# EAGLE board ATtiny85 (EAGLE 8.6.1)
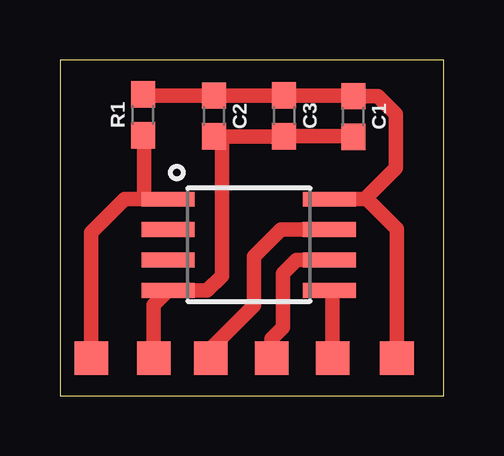
[diagram p0: board, top side]

Size 16 x 14 mm. Coordinates in mm from the lower left corner, seen from the top.
Outline: 0,0 16,0 16,14 0,14 0,0
Copper layers (1*16): Top 0.035mm / dielectric 1.5mm / Bottom 0.035mm
Design rules "OthermillDRC_1_64_v2": minimum track width 16mil, minimum drill 31mil, track to track 0.39878125mm, track to pad 0.39878125mm, pad to pad 0.39878125mm, via to via 0.39878125mm, smd to smd 0mil, copper to edge 0mil, drill to drill 1mil, minimum pad ring 0mil, minimum via ring 15mil, stop-mask expansion 1mil, vias tented up to drill 30mil, thermal gap 10mil

## Footprints (pad centres in the part's own frame; a part is rotated, then mirrored left to right if it is on the bottom)
0603 = smd 1.1 x 1: 1 -0.85,0; 2 0.85,0
TP14SQ = smd 1.4 x 1.4: TP 0,0
SO08-EIAJ_MCU = smd 0.61 x 2.21: 1 -1.905,-3.378; 2 -0.635,-3.378; 3 0.635,-3.378; 4 1.905,-3.378; 5 1.905,3.353; 6 0.635,3.353; 7 -0.635,3.353; 8 -1.905,3.353

## Placement (x,y rotation side)
C1  0.1uF  [0603]  12.23,11.64 270 top
C2  4.7uF  [0603]  6.42,11.66 270 top
C3  4.7uF  [0603]  9.35,11.67 270 top
GND  TPSTP14SQ  [TP14SQ]  3.91,1.57 0 top
MISO  TPSTP14SQ  [TP14SQ]  8.83,1.57 0 top
MOSI  TPSTP14SQ  [TP14SQ]  11.37,1.57 0 top
R1  10k  [0603]  3.47,11.71 90 top
RESET  TPSTP14SQ  [TP14SQ]  1.31,1.57 0 top
SCK  TPSTP14SQ  [TP14SQ]  6.29,1.57 0 top
U1  Tiny85-20-SMT  [SO08-EIAJ_MCU]  7.89,6.29 270 top
VCC  TPSTP14SQ  [TP14SQ]  14.05,1.57 0 top

## Library data of the parts
C1 = SparkFun-Capacitors; PROD_ID: CAP-08604
C2 C3 = SparkFun-Capacitors; PROD_ID: CAP-08280
GND MISO MOSI RESET SCK VCC = testpad
R1 = SparkFun-Resistors; PROD_ID: RES-00824
U1 = SparkFun-Retired; PROD_ID: IC-09092

## Nets
GND: C1.2 C2.2 C3.2 GND.TP U1.4
MISO: MISO.TP U1.6
MOSI: MOSI.TP U1.5
RESET: R1.1 RESET.TP U1.1
SCK: SCK.TP U1.7
VCC: C1.1 C2.1 C3.1 R1.2 U1.8 VCC.TP

## Tracks (layer width: path | path; a pad name or v marks a point on that pad's centre or on a via)
GND
  Top 0.61: GND.TP 3.91,3.78 U1.4 6.13,4.38 6.75,5 6.75,10.81 | C2.2 6.75,10.81 | 6.75,10.81 C3.2 12.2,10.82 C1.2
MISO
  Top 0.61: U1.6 9.86,5.66 9.3,5.1 9.3,2.84 8.83,2.37 MISO.TP
MOSI
  Top 0.61: MOSI.TP 11.37,4.26 U1.5
RESET
  Top 0.61: U1.1 3.5,8.2 | 3.5,8.2 2.69,8.2 1.3,6.8 1.31,6.79 RESET.TP | R1.1 3.5,10.83 3.5,8.2
SCK
  Top 0.61: U1.7 9.22,6.92 8.1,5.8 8.1,3.76 6.29,1.95 SCK.TP
VCC
  Top 0.61: VCC.TP 14.05,6.95 12.75,8.25 | 12.75,8.25 12.7,8.2 U1.8 | R1.2 3.52,12.51 C2.1 C3.1 12.2,12.52 C1.1 13.26,12.49 14,11.75 14,9.5 12.75,8.25